# Altium PCB ISO2.PcbDoc
Units mil, origin at the board's own origin, x right, y up, seen from the top; angles counter-clockwise.
Board outline 1889.76 x 1259.84 mil, 2 copper layers (Top Layer, Bottom Layer), stack 12.8 mil thick; 44 components, 28 nets, 124 pads, 425 vias.
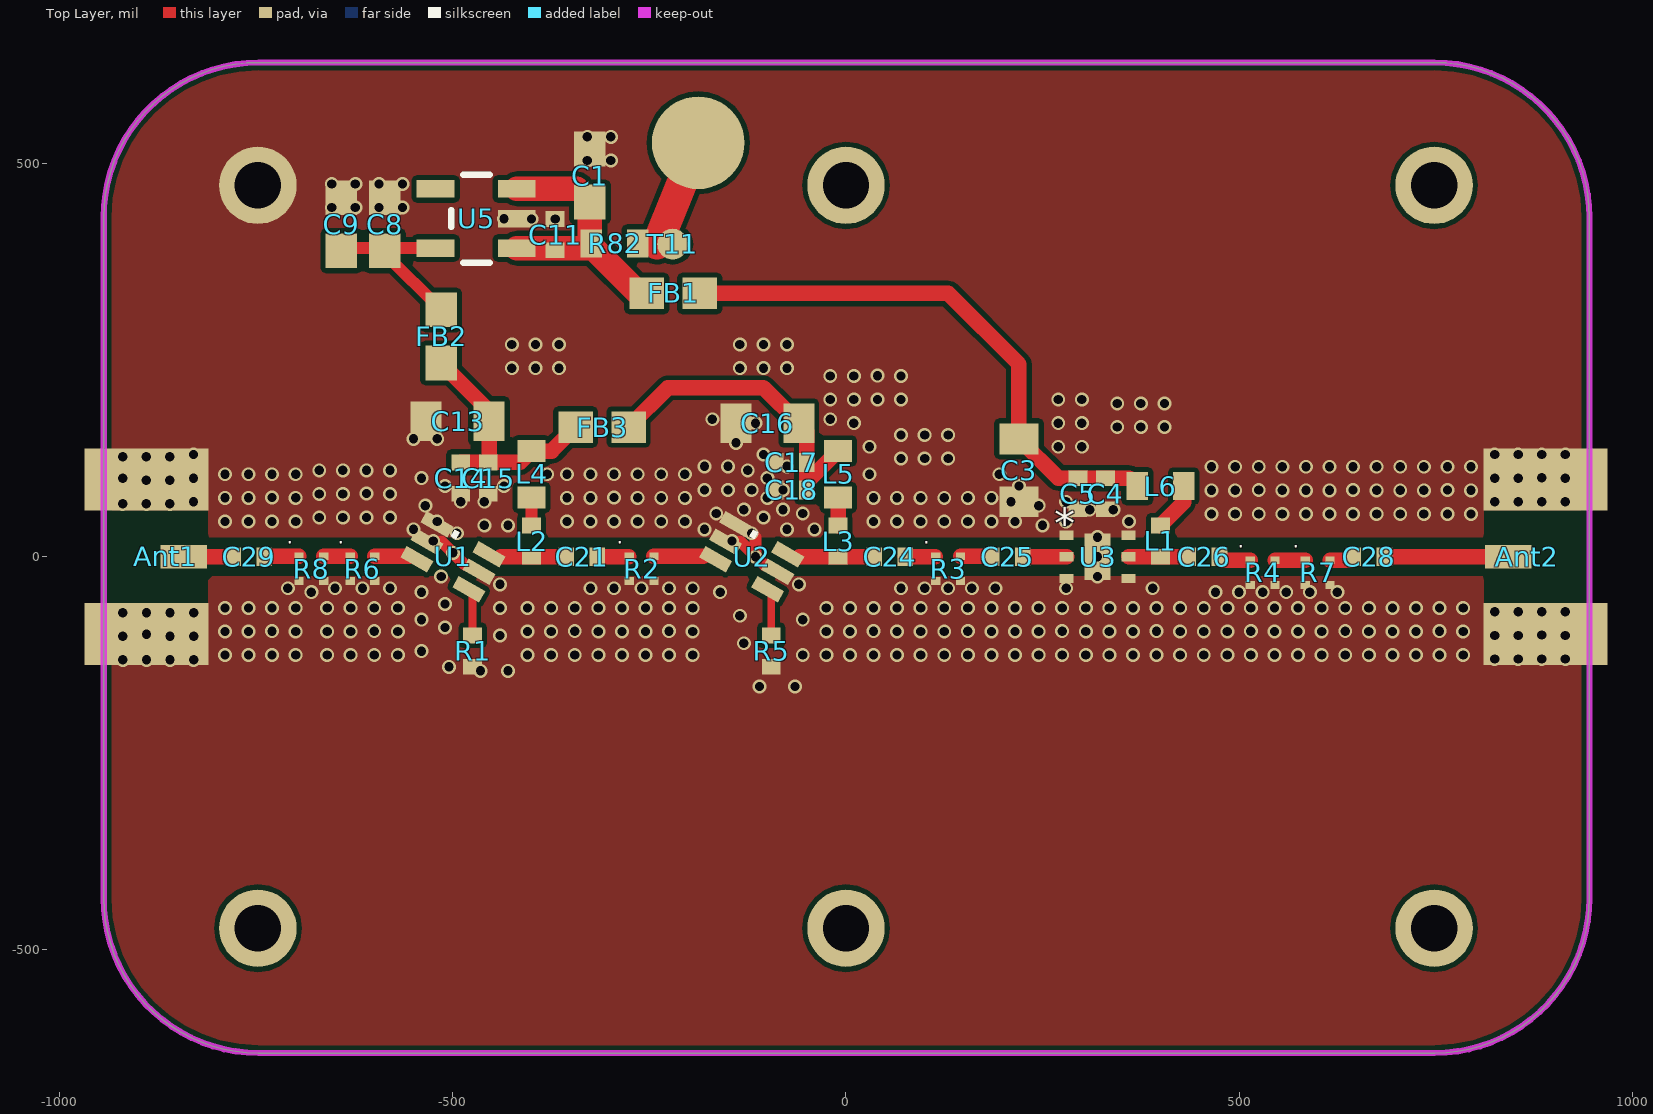
[diagram p0: Top Layer view]
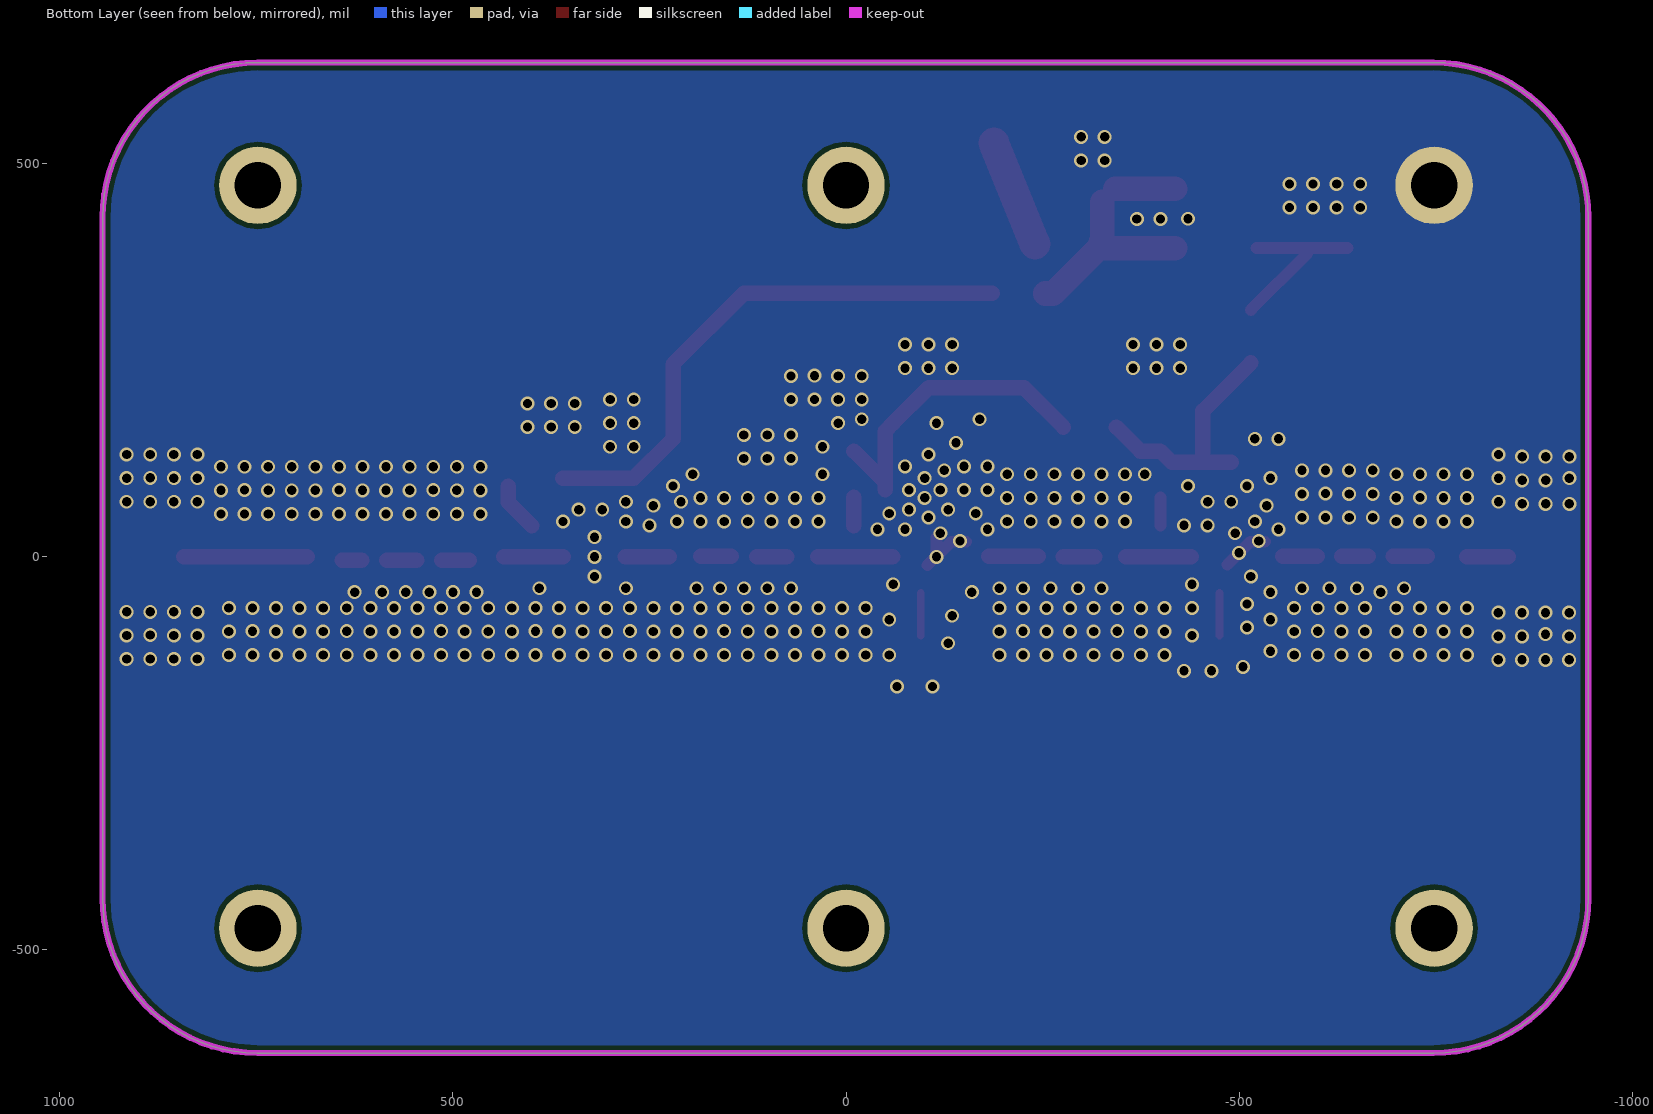
[diagram p1: Bottom Layer view, seen from below]

## Layer stack, top to bottom
Top Solder: solder mask 0.4, Solder Resist, Dk 3.5
Top Layer: signal copper 1.4
Dielectric 1: core 10, FR-4, Dk 4.2
Bottom Layer: signal copper 1.4
Bottom Solder: solder mask 0.4, Solder Resist, Dk 3.5

## Board outline
-944.21,-434.35 -944.21,431.79 cw(c-747.36,431.79) -747.36,628.64 748.7,628.64 cw(c748.7,431.79) 945.55,431.79 945.55,-434.35 cw(c748.7,-434.35) 748.7,-631.2 -747.36,-631.2 cw(c-747.36,-434.35)

## Design rules (kind name [scope] priority, off if disabled: settings)
Clearance Clearance_1 [(InNamedPolygon('Bottom Layer-No Net')) vs Not InNet('GND')] p1: gap=6 ignorepadtopadclearanceinfootprint=FALSE
Clearance [All] p2: gap=6 ignorepadtopadclearanceinfootprint=FALSE except(0: Arc-Hole Track-Hole SMDPad-Hole THPad-Hole Via-Hole Fill-Hole Poly-Hole Region-Hole Text-Hole)
DiffPairsRouting [All] p1: maxlimit=10 minlimit=10 mostfreqgap=10 toplayer_minwidth=5.98 toplayer_maxwidth=15 toplayer_prefwidth=15 bottomlayer_minwidth=5.98 bottomlayer_maxwidth=15 bottomlayer_prefwidth=15 maxuncoupledlength=500
HoleSize [All] p1: absolutevalues=TRUE maxlimit=120 minlimit=1 maxpercent=80.000 minpercent=20.000
MinimumSolderMaskSliver [All] p1 off: minsoldermaskwidth=10
PlaneClearance [All] p1: clearance=10
PlaneConnect [All] p1: planeconnectstyle=Direct reliefexpansion=20 reliefentries=4 reliefconductorwidth=10 reliefairgap=10
PolygonConnect [All] p1: connectstyle=Direct reliefconductorwidth=10 reliefentries=4 polygonreliefangle="90 Angle" airgapwidth=10
RoomDefinition main [InComponentClass('main')] p1 off: confinementstyle=ConfineIn formatcopy=TRUE lockcomponents=FALSE outline -7200.19,-1795.5 -4855.19,-1795.5 -4855.19,-1555.5 -7200.19,-1555.5
RoutingVias [All] p1: holewidth=12 width=20 viastyle="Through Hole" minholewidth=11.81 minwidth=19.68 maxholewidth=28 maxwidth=50
SilkToBoardRegionClearance [All] p1 off:
SilkToSilkClearance [All] p1 off: silktosilkclearance=10
SilkToSolderMaskClearance [IsPad] p1 off: minsilkscreentomaskgap=10 clearancetoexposedcopper=TRUE
SolderMaskExpansion [All] p1: expansion=4
Width [All] p1: maxlimit=60 minlimit=6 preferedwidth=6
22 further rules are at their usual default settings.

## Classes and differential pairs
net class 50R: AMP2 NetAnt1_1 NetAnt2_1 NetC21_1 NetC21_2 NetC24_2 NetC25_1 NetC25_2 NetC26_1 NetC26_2 NetC28_1 NetR2_3

## Components (designator, comment, footprint, x,y, rotation, side; value= is the part's Value field where it differs from the comment)
Ant1 "Antenna" SMA-2 -889.76,98.43 r270 top
Ant2 "Antenna" SMA-2 889.76,-98.43 r90 top
C1 "2.2uF" 0603 -325.79,485.24 r270 top
C3 "12nF" 0805 220,110 r90 top
C4 "1nF" 0402 330,80 r90 top
C5 "100pF" 0402 295,80 r90 top
C8 "0.1uF" 0603 -586.69,423.11 r270 top
C9 "2.2uF" 0603 -641.81,423.11 r270 top
C11 "0.1uF" 0402 -370,410 r270 top
C13 "12nF" 0805 -494.02,172.6 r0 top
C14 "1nF" 0402 -490,100 r90 top
C15 "100pF" 0402 -455,100 r90 top
C16 "12nF" 0805 -100,170 r0 top
C17 "1nF" 0402 -70,120 r0 top
C18 "100pF" 0402 -70,85 r0 top
C21 "1nF" 0402 -336.34,0 r0 top
C24 "1nF" 0402 55.35,0 r0 top
C25 "1nF" 0402 204.96,0 r0 top
C26 "1nF" 0402 455,0 r0 top
C28 "1nF" 0402 665,0 r0 top
C29 "1nF" 0402 -759.84,0 r0 top
FB1 "FB" 0603 -220,335 r0 top
FB2 "FB" 0603 -515,280 r90 top
FB3 "FB" 0603 -310,165 r180 top
L1 "Inductor" 0402 400,20 r270 top value=10nH
L2 "Inductor" 0402 -400,20 r270 top value=10nH
L3 "Inductor" 0402 -10,20 r270 top value=10nH
L4 "Inductor" 0603L -400,105 r270 top value=100nH
L5 "Inductor" 0603L -10,105 r270 top value=100nH
L6 "Inductor" 0603L 400,90 r0 top value=100nH
R1 "NC" 0402 -475,-120 r90 top
R2 "EXB24-RF-ATT" EXB24AT-RF-ATT -260,-15 r0 top
R3 "EXB24-RF-ATT" EXB24AT-RF-ATT 130,-15 r0 top
R4 "EXB24-RF-ATT" EXB24AT-RF-ATT 530,-20 r0 top
R5 "NC" 0402 -95,-120 r90 top
R6 "EXB24-RF-ATT" EXB24AT-RF-ATT -615,-15 r0 top
R7 "EXB24-RF-ATT" EXB24AT-RF-ATT 600,-20 r0 top
R8 "EXB24-RF-ATT" EXB24AT-RF-ATT -680,-15 r0 top
R82 "FB" 0603L -294.29,398.62 r0 top value=0Ohm
T11 "TestPad" "TestPad - 1mm" -220.47,397.64 r180 top
U1 "MGA85563" SC-70-6 -500,0 r150 top
U2 "MGA85563" SC-70-6 -120,0 r150 top
U3 "HMC788" HMC788 320,0 r0 top
U5 "LP5907" SOT23-5 -470,430 r90 top

## Footprints (in the part's own frame and the unit in brackets; to place one, negate y for a bottom-side part, rotate by r counter-clockwise, add the part's x,y. Pads: shape width x height; smd on the part's side, far side on the other; paste and mask are expansions set on the pad)
0402 [mil] "0402-RES"
  rect 20x24 smd: 1(-19.68,0) 2(20,0)
0603 [mil] "0603-RES"
  rect 44x40 smd: 1(-33.46,0) 2(34,0)
  body extent -31,-16 31,16, height 31
0603L [mm]
  rect 0.7x0.9 smd: 1(-0.75,0) 2(0.75,0)
  body extent -0.8,-0.4 0.8,0.4, height 0.8
0805 [mil]
  rect 39.37x50 smd: 1(-40,0) 2(40,0)
  body extent -50,-30 50,30, height 31
EXB24AT-RF-ATT [mm]
  rect 0.3x0.25 smd: 1(-0.4,-0.4) 2(0.4,-0.4) 3(0.4,0.4) 4(-0.4,0.4)
  body extent -0.5,-0.5 0.5,0.5, height 0.35
HMC788 [mm]
  rect 0.85x1.5 smd: 0(0,0)
  rect 0.45x0.3 smd: 1(-1,0.7) 2(-1,0) 3(-1,-0.7) 4(1,-0.7) 5(1,0) 6(1,0.7)
  body extent -1,-1 1,1, height 0.75
SC-70-6 [mm]
  rect 1x0.42 smd mask+0.051: 1(0.97,-0.65) 2(0.97,0) 3(0.97,0.65) 4(-0.97,0.65) 5(-0.975,0) 6(-0.97,-0.65)
  silkscreen extent 0.2,-0.8 0.4,-0.53
SMA-2 [mm]
  rect 0.75x1.5 smd: 1(2.5,1.2)
  rect 2x4 smd: GND(0,0) GND(5,0)
  Top Layer pour cut-out: 1,2 4,2 4,-2 1,-2
SOT23-5 [mil] "SOT23-5"
  rect 22x48 smd: 1(-37.4,-51.19) 2(0,-51.19) 3(38,-51.19) 4(38,52) 5(-37.4,52)
  silkscreen extent -56,-17 56,32, body extent -57,-55 57,55, height 47
"TestPad - 1mm" [mm]
  round 1 smd: 1(0,0)

## Part data
C1 C3 C4 C5 C8 C9 C11 C13 C14 C15 C16 C17 C18 C21 C24 C25 C26 C28 C29: library part CAP0402-CAP, "<b>Capacitor</b> / Standard 0603 ceramic capacitor, and 0.1\" leaded capacitor.", PARTNO=CC0402ZRY5V7BB104
FB1 FB2 FB3 R1 R5 R82: library part Res2, "Resistor", LatestRevisionDate=17-Jul-2002, LatestRevisionNote="Re-released for DXP Platform.", PackageDescription="Axial Device, Thru-Hole; 2 Leads; 0.4 in Pin Spacing", PackageReference=AXIAL-0.4, Published=8-Jun-2000, Publisher="Altium Limited"
L1 L2 L3 L4 L5 L6: Code_IEC=1005, Code_JEITA=0402, LatestRevisionDate=29-May-2009, LatestRevisionNote="IPC-7351 Footprint Added.", PackageDescription="Chip Inductor", PackageReference=0402-A, Published=8-Jun-2000, Publisher="Altium Limited"

## Free pads (board coordinates)
  round 98.43 hole 59.06: 0(-748.03,-472.44) 0(-748.03,472.44) 0(0,-472.44) 0(0,472.44) 0(748.03,-472.44) 0(748.03,472.44)
  round 118.11 smd: 11(-187.99,526.58)

## Via types
v1: diameter 17.72, hole 11.81, Top Layer to Bottom Layer, tented both sides, 346 vias
v2: diameter 17.72, hole 11.81, Top Layer to Bottom Layer, 79 vias

## Nets (pads, with @x,y where several pads share a name; then routed paths per layer and width w, separated by ;. In a path a pad name is that pad's centre, name@x,y a point inside that pad or via, vN(x,y) a via of type N, cw(c..) or ccw(c..) an arc to the next point about the centre after c; other vN are vias at no path point)
3V: C8.2 C9.2 FB2.2 U5.5 | length 221.1
  Top Layer w15: C9.2@-638.32,392.6 U5.5 ; C8.2 -586.69,385.69 FB2.2
5V: C1.2 C11.2 FB1.1 R82.1 U5.1 U5.3 | length 325.8
  Top Layer w31.5: U5.1 -329.84,392.6 R82.1 ; U5.3 C1.2@-342.55,468 ; C1.2 -325.79,397.39 -325.42,397.02 -323.82,395.43 -263.39,335 FB1.1
AMP2: C24.1 L3.2 U2.6 | length 95.1
  Top Layer w19.68: U2.6@-59.39,0 L3.2 C24.1
GND: Ant1.GND Ant2.GND C1.1 C3.1 C4.1 C5.1 C8.1 C9.1 C11.1 C13.1 C14.1 C15.1 C16.1 C17.1 C18.1 pad.0@-748.03,472.44 R1.1 R2.1 R2.2 R3.1 R3.2 R4.1 R4.2 R5.1 R6.1 R6.2 R7.1 R7.2 R8.1 R8.2 U1.1 U1.2 U1.5 U2.1 U2.2 U2.5 U3.0 U3.1 U3.3 U3.4 U3.6 U5.2 | length 147
  Top Layer w15: U1.2 -514.09,19.09 v2(-500,5) -485,-10 ; U2.2 -134.09,19.09 v2(-115,0) ; v2@-115,25 v2(-115,0) ; U2.5@-103.56,-10.75 -114.31,0 v2(-115,0)
  other v1: -919.76,-131.1 -889.76,-131.1 -859.76,-131.1 -829.76,-131.1 825,-130 855,-130 885,-130 915,-130 -790,-125 -760,-125 -730,-125 -700,-125 -660,-125 -630,-125 -600,-125 -570,-125 -405,-125 -375,-125 -345,-125 -315,-125 -285,-125 -255,-125 -225,-125 -195,-125 -25,-125 5,-125 35,-125 65,-125 95,-125 125,-125 155,-125 185,-125 215,-125 245,-125 275,-125 305,-125 335,-125 365,-125 395,-125 425,-125 455,-125 485,-125 515,-125 545,-125 575,-125 605,-125 635,-125 665,-125 695,-125 725,-125 755,-125 785,-125 -919.76,-101.1 -859.76,-101.1 -829.76,-101.1 825,-100 855,-100 885,-99.53 915,-100 -889.76,-98.43 -790,-95 -760,-95 -730,-94.53 -700,-95 -660,-95 -630,-95 -600,-94.53 -570,-95 -405,-95 -375,-95 -345,-94.53 -315,-95 -285,-95 -255,-95 -225,-94.53 -195,-95 -25,-95 5,-95 35,-94.53 65,-95 95,-95 125,-95 155,-94.53 185,-95 215,-95 245,-95 275,-94.53 305,-95 335,-95 365,-95 395,-94.53 425,-95 455,-95 485,-95 515,-94.53 545,-95 575,-95 605,-95 635,-94.53 665,-95 695,-95 725,-95 755,-94.53 785,-95 -919.76,-71.1 -889.76,-71.1 -859.76,-71.1 -829.76,-71.1 825,-70 855,-70 885,-70 915,-70 -790,-65 -760,-65 -730,-65 -700,-65 -660,-65 -630,-65 -600,-65 -570,-65 -405,-65 -375,-65 -345,-65 -315,-65 -285,-65 -255,-65 -225,-65 -195,-65 -25,-65 5,-65 35,-65 65,-65 95,-65 125,-65 155,-65 185,-65 215,-65 245,-65 275,-65 305,-65 335,-65 365,-65 395,-65 425,-65 455,-65 485,-65 515,-65 545,-65 575,-65 605,-65 635,-65 665,-65 695,-65 725,-65 755,-65 785,-65 470,-45 500,-45 560,-45 590,-45 -710,-40 -650,-40 -325,-40 -295,-40 -225,-40 -195,-40 70,-40 100,-40 160,-40 190,-40 -790,45 -760,45 -730,45 -700,45 -520,45 -355,45 -325,45 -295,45 -265,45 -235,45 -205,45 35,45 65,45 95,45 125,45 155,45 185,45 -670,50 -640,50 -610,50 -580,50 465,54.53 495,54.53 525,54.53 555,54.53 585,54.53 615,54.53 645,54.53 675,54.53 705,54.53 735,54.53 765,54.53 795,54.53 -920,67.32 -890,67.32 -860,67.32 -830,70 825,70 855,70 885,70 915,70 -790,75 -760,75 -730,75.47 -700,75 -355,75 -325,75 -295,75.47 -265,75 -235,75 -205,75 35,75 65,75 95,75 125,75 155,75 185,75 -670,80 -640,80 -610,80.47 -580,80 465,84.53 495,84.53 555,84.53 585,84.53 615,84.53 675,84.53 705,84.53 735,84.53 795,84.53 -180,85 -150,85 -120,85 525,85 645,85 765,85 -890,97.32 -860,97.32 -920,100 -830,100 825,100 855,100 885,100.47 915,100 -790,105 -760,105 -730,105 -700,105 -355,105 -325,105 -295,105 -265,105 -235,105 -205,105 -670,110 -640,110 -610,110 -580,110 -125,110 465,114.53 495,114.53 525,114.53 555,114.53 585,114.53 615,114.53 645,114.53 675,114.53 705,114.53 735,114.53 765,114.53 795,114.53 -180,115 -150,115 70,125 100,125 130,125 -920,127.32 -890,127.32 -860,127.32 -830,130 825,130 855,130 885,130 915,130 270,140 300,140 -550,150 -520,150 70,155 100,155 130,155 345,165 375,165 405,165 270,170 300,170 345,195 375,195 405,195 -20,200 10,200 40,200 70,200 270,200 300,200 -20,230 10,230 40,230.47 70,230 -425,240 -395,240 -365,240 -135,240 -105,240 -75,240 -425,270 -395,270 -365,270 -135,270 -105,270 -75,270 -400,429.69 -370,429.69 -435,430 -654.06,444.17 -624.06,444.17 -594.06,444.17 -564.06,444.17 -654.06,474.17 -624.06,474.17 -594.06,474.17 -564.06,474.17 -329.06,504.17 -299.06,504.17 -329.06,534.17 -299.06,534.17
  other v2: -110,-165 -65,-165 -465,-145 -430,-145 -505,-140 -55,-125 -540,-120 -130,-110 -440,-100 -510,-90 -540,-80 -55,-80 -135,-75 -440,-65 -510,-60 -680,-45 -540,-45 -160,-45 530,-45 625,-45 -615,-40 -580,-40 -260,-40 130,-40 280,-40 390,-40 -440,-35 -60,-35 -515,-25 320,-25 320,0 -525,20 -145,20 320,25 -495,30 -120,30 -550,35 -180,35 -75,35 -40,35 -460,40 -430,40 250,40 215,45 280,45 360,45 -105,50 -165,55 -55,55 -130,60 -80,60 310,60 340,60 -535,65 245,65 -490,70 -460,70 210,70 280,70 -100,75 -80,85 -510,90 -435,90 220,90 -540,100 -100,100 -380,105 30,105 195,105 -75,115 -105,130 30,140 -140,145 -115,170 10,170 -170,175 -20,175
NetAnt1_1: Ant1.1 C29.1 | length 53.1
  Top Layer w19.68: Ant1.1 C29.1@-789.37,0
NetAnt2_1: Ant2.1 C28.2 | length 157.5
  Top Layer w19.68: C28.2 Ant2.1
NetC3_2: C3.2 C4.2 C5.2 FB1.2 L6.1 | length 699.5
  Top Layer w19.68: FB1.2 130,335 220,245 C3.2 270,100 C5.2 C4.2 L6.1@360.47,100
NetC13_2: C13.2 C14.2 C15.2 FB2.1 FB3.2 L4.1 | length 316.8
  Top Layer w19.68: FB2.1 -454.02,185.55 C13.2 -454.02,120.98 C15.2 ; C14.2 C15.2 ; FB3.2 -374.47,134.53 L4.1 -414.53,120 C15.2
NetC16_2: C16.2 C17.2 C18.2 FB3.1 L5.1 | length 401.6
  Top Layer w19.68: FB3.1 -226.54,215 -105,215 C16.2 -50,160 C17.2 C18.2@-50,94.53 ; C18.2 C18.2@-50,94.53 ; L5.1 C18.2@-50,94.53
NetC21_1: C21.1 L2.2 U1.6 | length 83.4
  Top Layer w19.68: U1.6@-439.39,0 L2.2 C21.1
NetC21_2: C21.2 R2.4 | length 39.8
  Top Layer w19.68: C21.2 R2.4@-276.5,0
NetC24_2: C24.2 R3.4 | length 38.1
  Top Layer w19.68: C24.2 R3.4@113.5,0
NetC25_1: C25.1 R3.3 | length 38.8
  Top Layer w19.68: R3.3 C25.1@184.53,0.75
NetC25_2: C25.2 U3.2 | length 55.7
  Top Layer w19.68: C25.2 U3.2
NetC26_1: C26.1 L1.2 U3.5 | length 75.9
  Top Layer w19.68: U3.5 L1.2 C26.1
NetC26_2: C26.2 R4.4 | length 35
  Top Layer w19.68: C26.2@479.25,-4.25 R4.4
NetC28_1: C28.1 R7.3 | length 25.3
  Top Layer w19.68: R7.3 C28.1@641.06,-4.25
NetC29_2: C29.2 R8.4 | length 43.3
  Top Layer w19.68: C29.2@-739.09,0.75 R8.4
NetL1_1: L1.1 L6.2 | length 62.5
  Top Layer w19.68: L1.1 429.53,69.21 L6.2
NetL2_1: L2.1 L4.2 | length 35.8
  Top Layer w15: L2.1 L4.2
NetL3_1: L3.1 L5.2 | length 35.8
  Top Layer w19.68: L3.1 L5.2
NetR1_2: R1.2 U1.4 | length 54
  Top Layer w10: R1.2 U1.4@-475,-45.98
NetR2_3: R2.3 U2.3 | length 63
  Top Layer w19.68: R2.3 U2.3@-181.29,0.75
NetR4_3: R4.3 R7.4 | length 38.5
  Top Layer w19.68: R4.3 R7.4
NetR5_2: R5.2 U2.4 | length 54
  Top Layer w10: R5.2 U2.4@-95,-45.98
NetR6_3: R6.3 U1.3 | length 43.6
  Top Layer w19.68: R6.3 U1.3@-555.63,0.75
NetR6_4: R6.4 R8.3 | length 33.5
  Top Layer w19.68: R8.3 R6.4
NetR82_2: pad.11 R82.2 T11.1 | length 139.1
  Top Layer w39.37: -240.16,397.64 pad.11
pads on no net: U5.4

## Polygon pours and split planes (outlines as drawn)
GND on Top Layer "GND_L01_P004" (solid, remove dead copper, pour order 4): -944.21,-434.35 -944.21,431.79 cw(c-747.36,431.79) -747.36,628.64 748.7,628.64 cw(c748.7,431.79) 945.55,431.79 945.55,-434.35 cw(c748.7,-434.35) 748.7,-631.2 -747.36,-631.2 cw(c-747.36,-434.35)
GND on Bottom Layer "GND_L02_P006" (solid, remove dead copper, pour order 6): -944.21,-434.35 -944.21,431.79 cw(c-747.36,431.79) -747.36,628.64 748.7,628.64 cw(c748.7,431.79) 945.55,431.79 945.55,-434.35 cw(c748.7,-434.35) 748.7,-631.2 -747.36,-631.2 cw(c-747.36,-434.35)

## Keep-outs
Keep-Out Layer:
  the board outline again, w7.87

## Other copper
Top Layer:
  pour cut-out: -810,25 810,25 810,-25 -810,-25

## Silkscreen, mask and mechanical layers (free items; w line width, h text height)
Top Solder:
  rectangle: -445,230 -345,290
  rectangle: 325,155 425,215
  rectangle: 50,115 150,175
  rectangle: -155,230 -55,290
Bottom Solder:
  rectangle: -944.21,-631.2 945.55,635
Mechanical 1:
  lines w0.5: 959.84,-25.98 959.48,-23.93 959.15,-21.87 958.88,-20.06 958.65,-18.39 958.46,-16.82 958.29,-15.36 958.15,-13.99 958.02,-12.67 957.91,-11.4 957.82,-10.18 957.74,-9.02 957.68,-7.9 957.62,-6.79 957.58,-5.72 957.54,-4.66 957.51,-3.64 957.49,-2.63 957.48,-1.67 957.48,-0.71 957.48,-0.16 957.5,1.66 957.55,3.37 957.61,4.99 957.68,6.5 957.77,7.96 957.87,9.37 957.98,10.73 958.1,12.04 958.23,13.29 958.36,14.5 958.51,15.71 958.65,16.86 958.81,18.02 958.97,19.12 959.13,20.23 959.3,21.28 959.47,22.33 959.66,23.39 959.84,24.44
Mechanical 3:
  lines w0.5: -1113.51,-690.25 -1082.01,-690.25 -983.58,-690.25 ; -1113.51,687.7 -1082.01,687.7 -983.58,687.7 ; -983.58,-820.17 -983.58,-788.68 -983.58,-690.25 ; -983.58,-560.33 -983.58,-591.83 -983.58,-690.25 ; -983.58,557.78 -983.58,589.27 -983.58,687.7 ; -983.58,817.62 -983.58,786.12 -983.58,687.7 ; -877.29,-473.72 -845.79,-473.72 -747.36,-473.72 ; -877.29,471.16 -845.79,471.16 -747.36,471.16 ; -853.66,-690.25 -885.16,-690.25 -983.58,-690.25 ; -853.66,687.7 -885.16,687.7 -983.58,687.7 ; -747.36,-603.64 -747.36,-572.14 -747.36,-473.72 ; -747.36,-343.8 -747.36,-375.29 -747.36,-473.72 ; -747.36,341.24 -747.36,372.74 -747.36,471.16 ; -747.36,601.09 -747.36,569.59 -747.36,471.16 ; -617.44,-473.72 -648.94,-473.72 -747.36,-473.72 ; -617.44,471.16 -648.94,471.16 -747.36,471.16 ; -129.25,-690.25 -97.76,-690.25 0.67,-690.25 ; -129.25,-473.72 -97.76,-473.72 0.67,-473.72 ; -129.25,471.16 -97.76,471.16 0.67,471.16 ; -129.25,687.7 -97.76,687.7 0.67,687.7 ; 0.67,-820.17 0.67,-788.68 0.67,-690.25 ; 0.67,-603.64 0.67,-572.14 0.67,-473.72 ; 0.67,-560.33 0.67,-591.83 0.67,-690.25 ; 0.67,-343.8 0.67,-375.29 0.67,-473.72 ; 0.67,341.24 0.67,372.74 0.67,471.16 ; 0.67,557.78 0.67,589.27 0.67,687.7 ; 0.67,601.09 0.67,569.59 0.67,471.16 ; 0.67,817.62 0.67,786.12 0.67,687.7 ; 130.59,-690.25 99.09,-690.25 0.67,-690.25 ; 130.59,-473.72 99.09,-473.72 0.67,-473.72 ; 130.59,471.16 99.09,471.16 0.67,471.16 ; 130.59,687.7 99.09,687.7 0.67,687.7 ; 618.78,-473.72 650.27,-473.72 748.7,-473.72 ; 618.78,471.16 650.27,471.16 748.7,471.16 ; 748.7,-603.64 748.7,-572.14 748.7,-473.72 ; 748.7,-343.8 748.7,-375.29 748.7,-473.72 ; 748.7,341.24 748.7,372.74 748.7,471.16 ; 748.7,601.09 748.7,569.59 748.7,471.16 ; 855,-690.25 886.49,-690.25 984.92,-690.25 ; 855,687.7 886.49,687.7 984.92,687.7 ; 878.62,-473.72 847.12,-473.72 748.7,-473.72 ; 878.62,471.16 847.12,471.16 748.7,471.16 ; 984.92,-820.17 984.92,-788.68 984.92,-690.25 ; 984.92,-560.33 984.92,-591.83 984.92,-690.25 ; 984.92,557.78 984.92,589.27 984.92,687.7 ; 984.92,817.62 984.92,786.12 984.92,687.7 ; 1114.84,-690.25 1083.34,-690.25 984.92,-690.25 ; 1114.84,687.7 1083.34,687.7 984.92,687.7

## Text inside footprints (layer, text, board x,y; h text height)
U3: Top Overlay "*" at 264.88,78.74 h39.37 r180